# Altium PCB Mini-Rambo-ATX-Panel.PcbDoc
Units mm, origin at the board's own origin, x right, y up, seen from the top; angles counter-clockwise.
Board outline 223.1 x 226.1 mm, 4 copper layers (Top, GND, Supply, Bottom), stack 1.57 mm thick; 8 components, 0 nets, 12 pads, 0 vias.
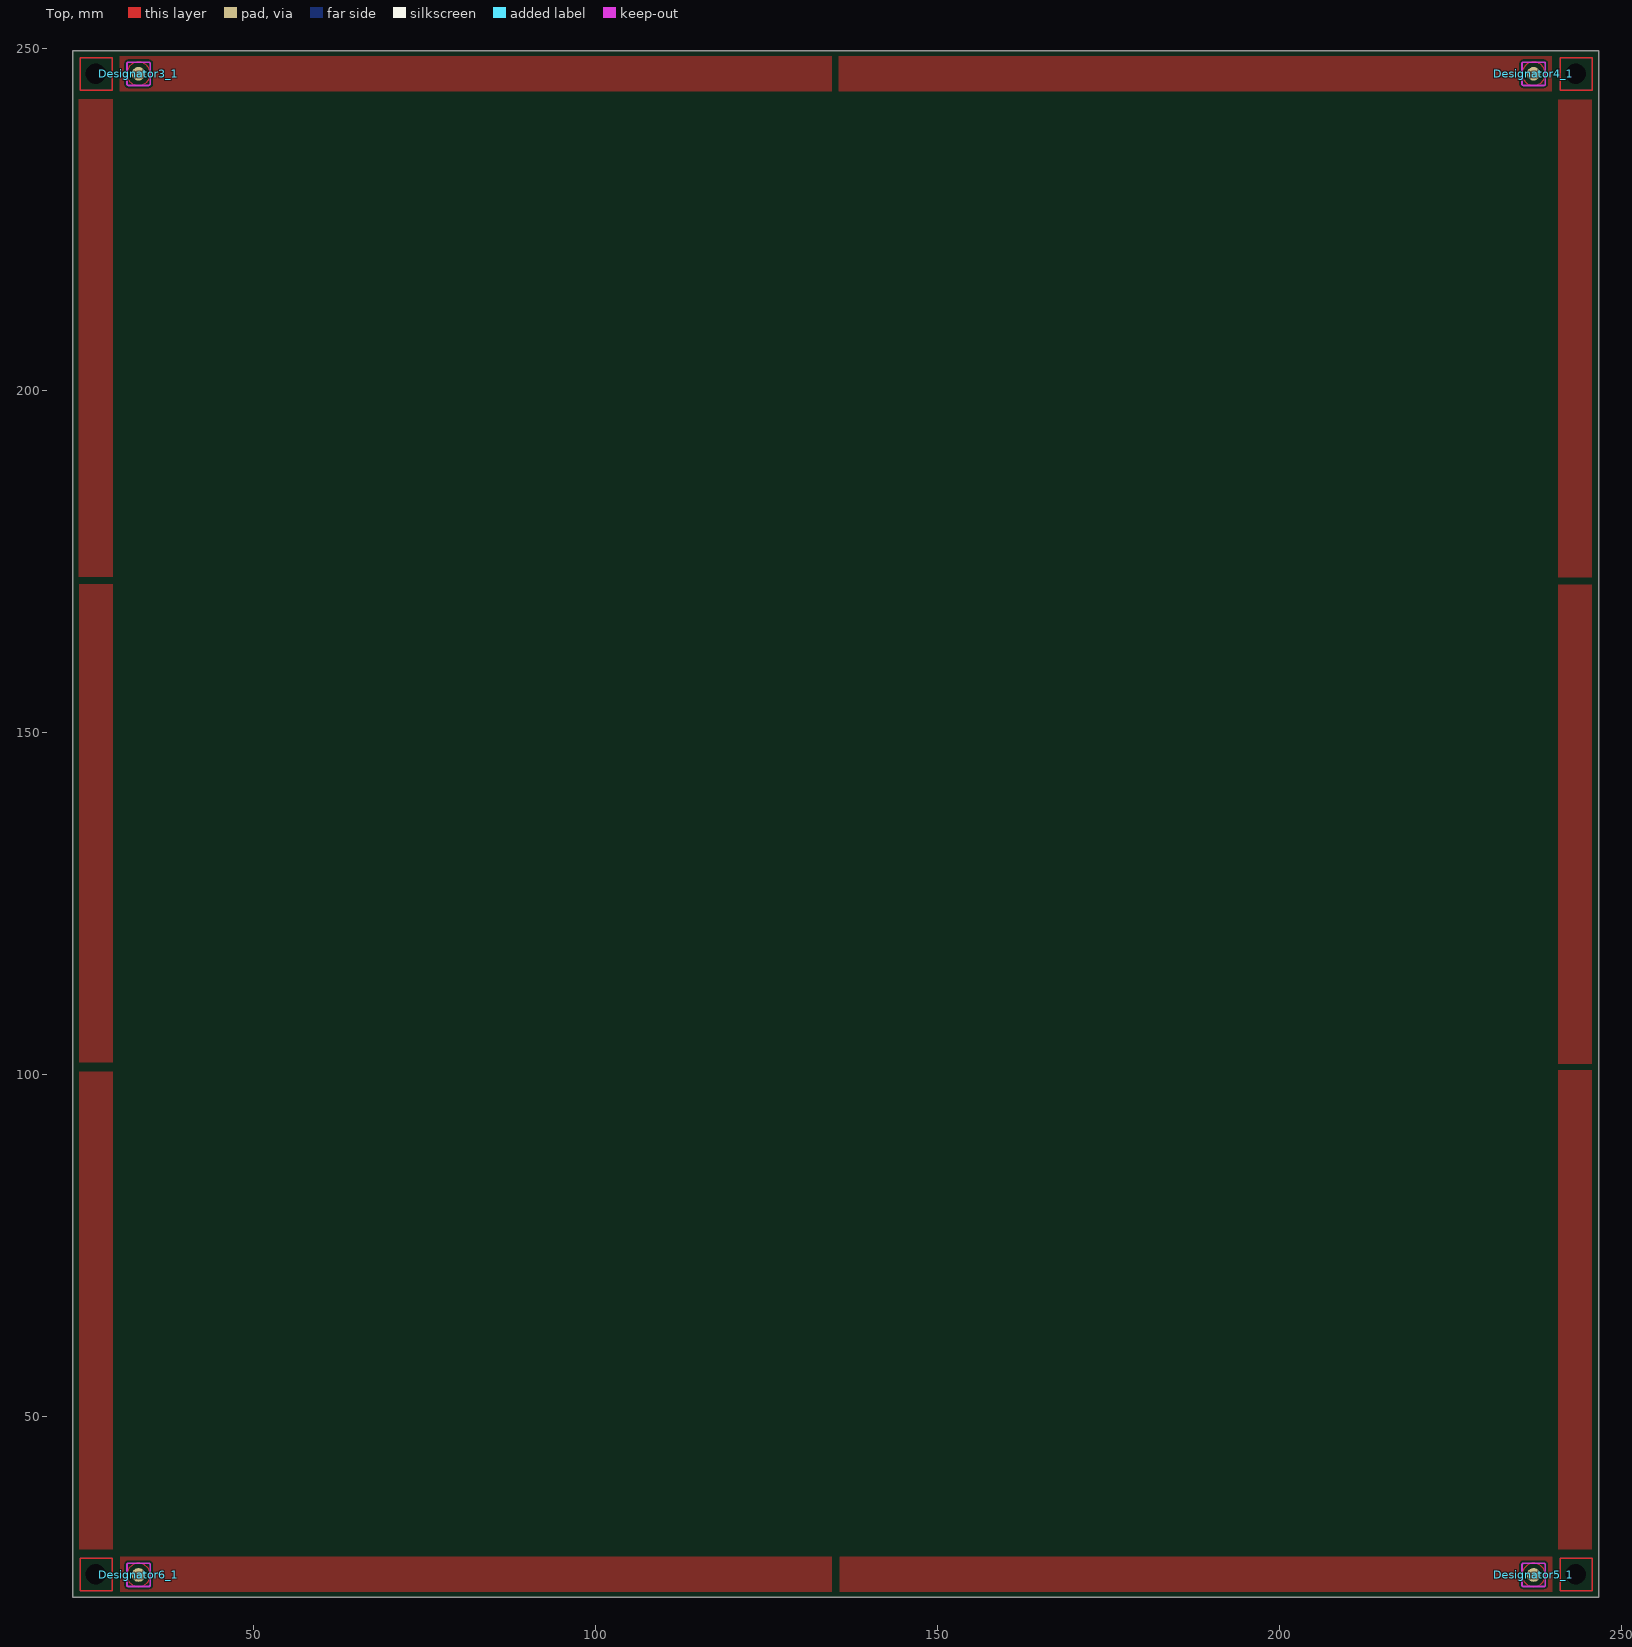
[diagram p0: Top view]
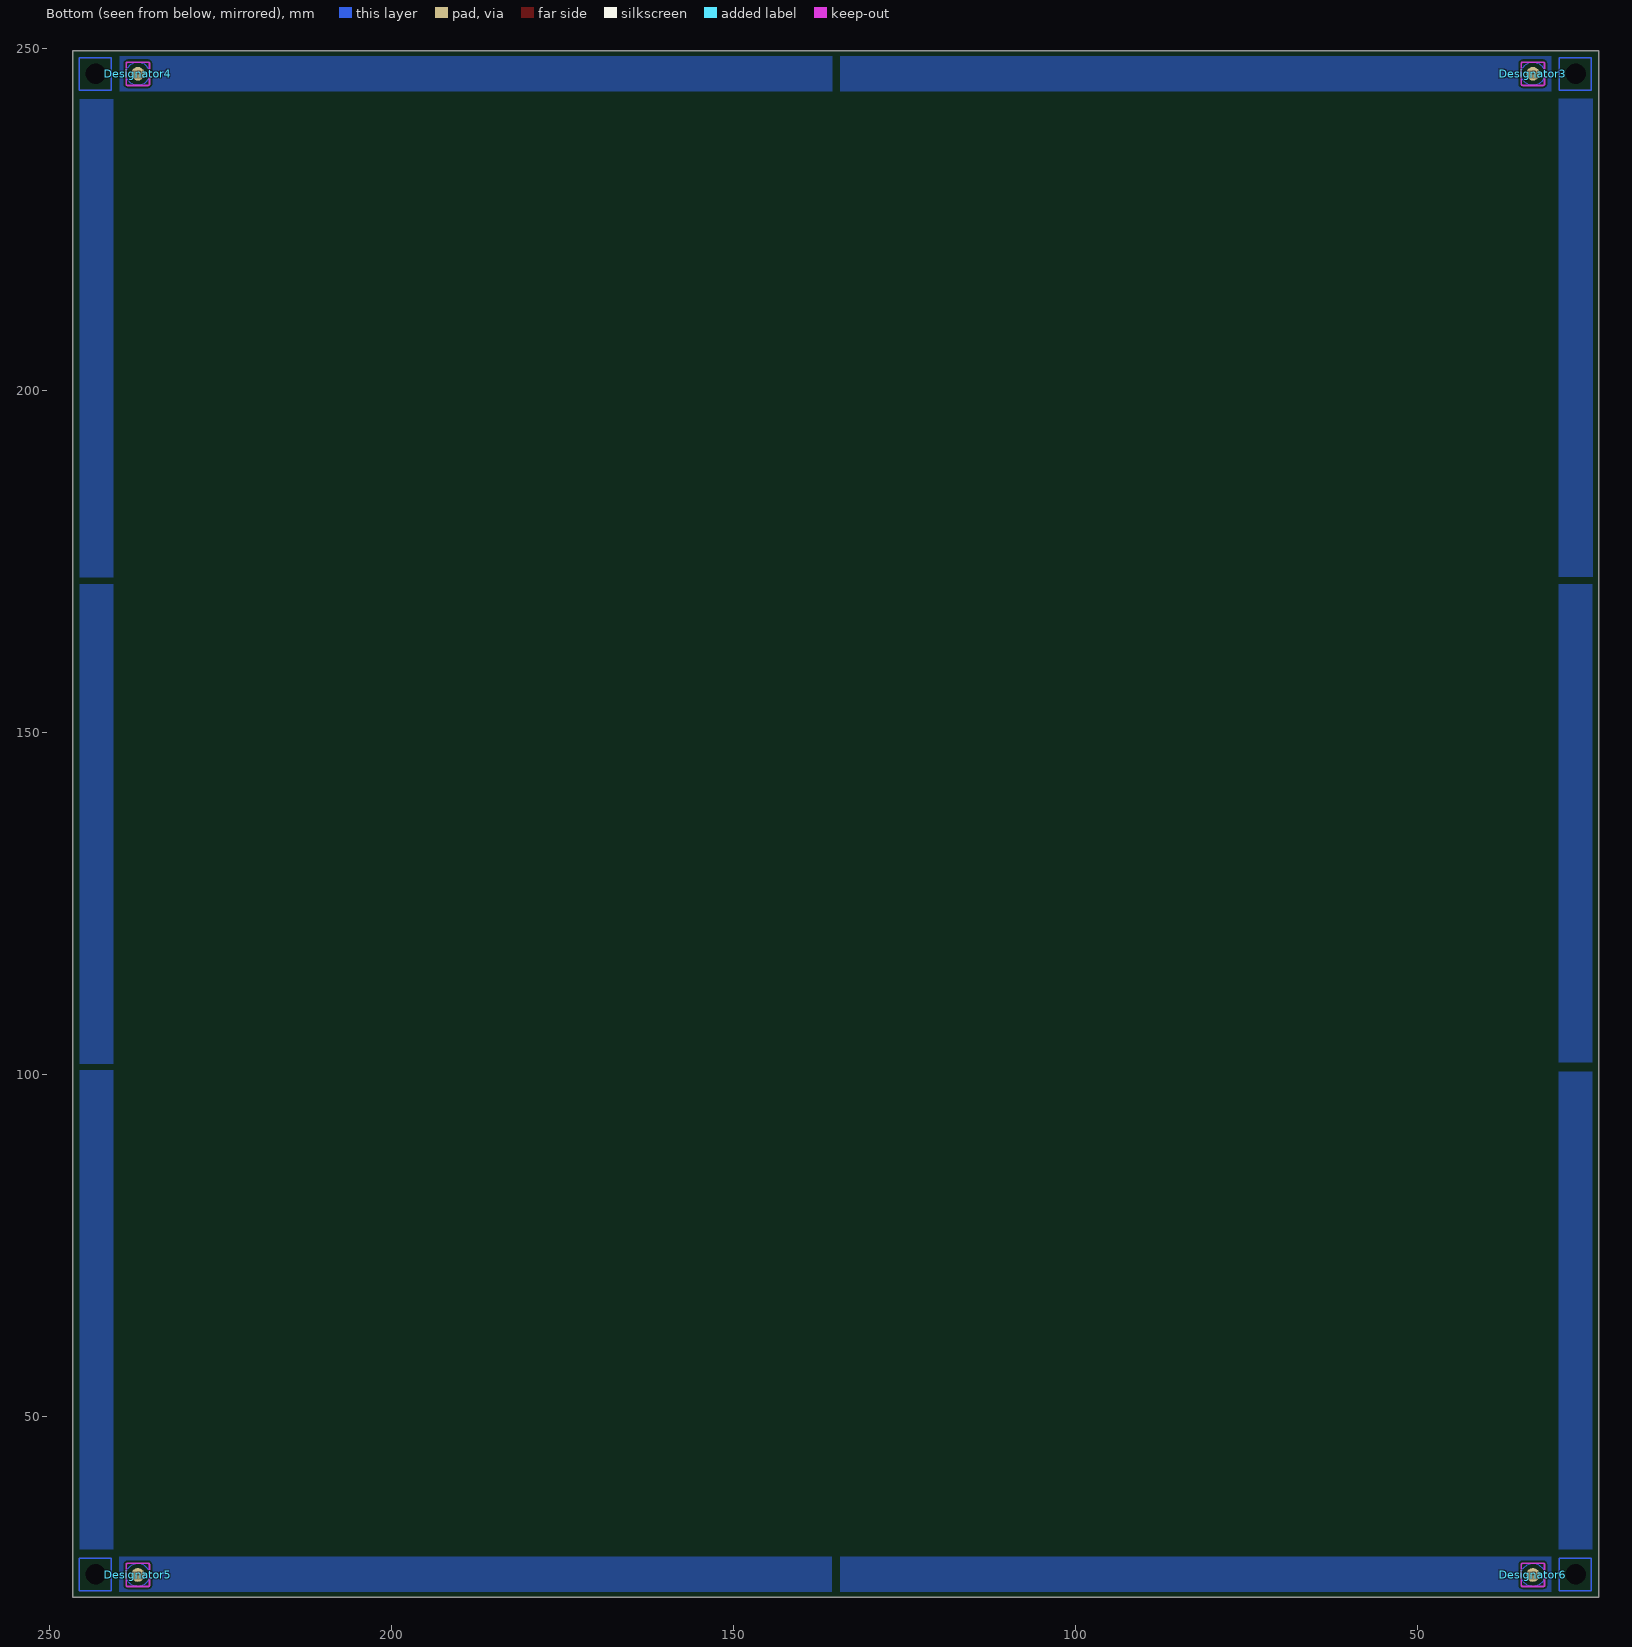
[diagram p1: Bottom view, seen from below]
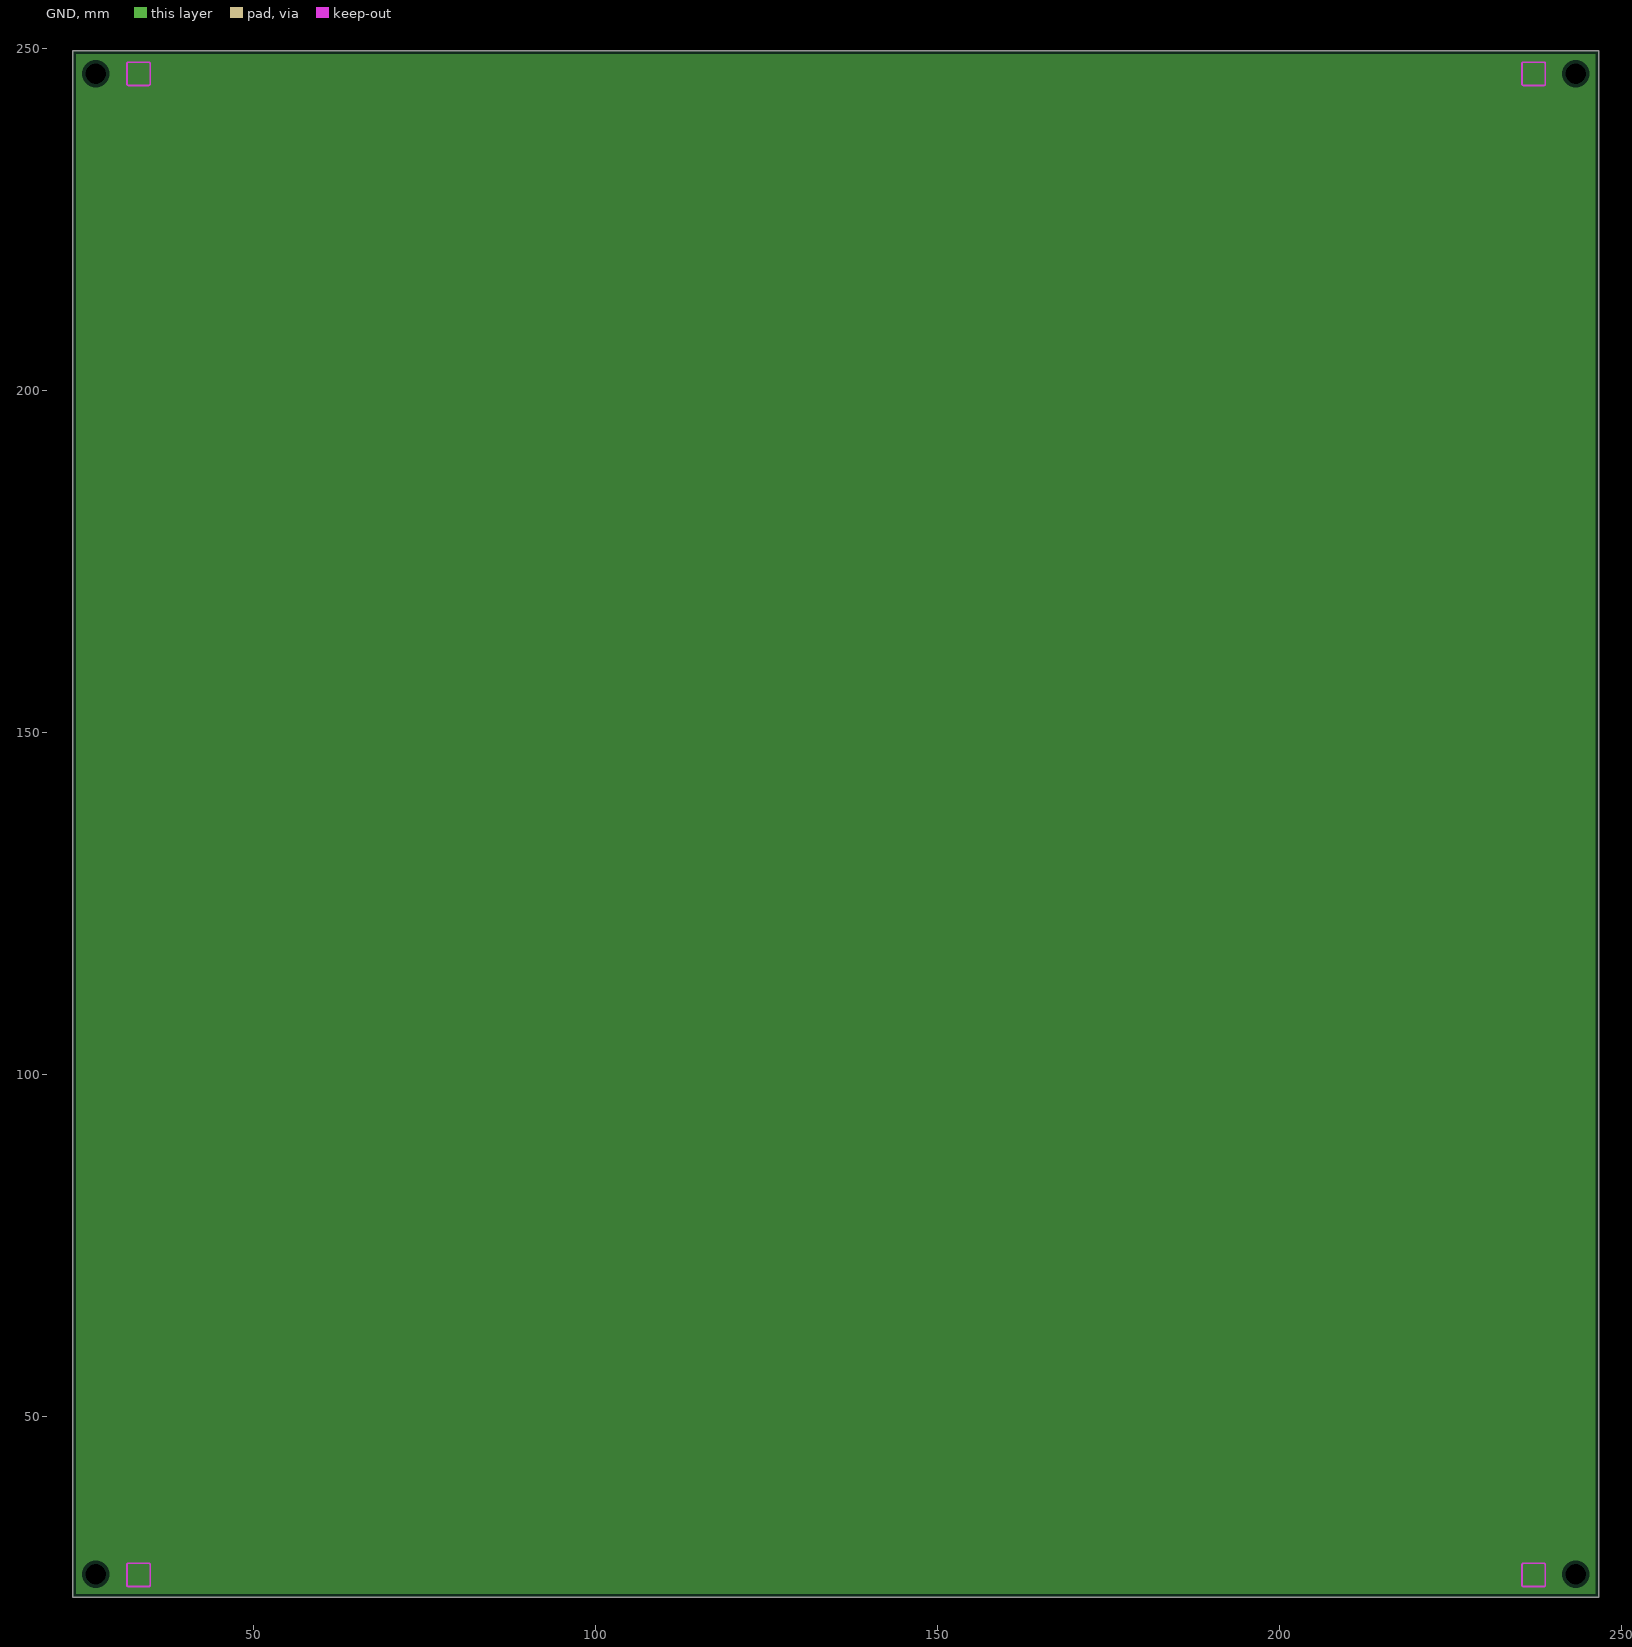
[diagram p2: GND, clearances drawn from the general rule]

## Layer stack, top to bottom
Top Solder: solder mask 0.012, Solder Resist, Dk 3.5
Top: signal copper 0.07
Dielectric 1: prepreg 0.55, FR-4, Dk 4.2
GND: plane copper 0.035
Dielectric 2: core 0.26, FR-4, Dk 4.2
Supply: signal copper 0.035
Dielectric 3: prepreg 0.55, FR-4, Dk 4.2
Bottom: signal copper 0.07
Bottom Solder: solder mask 0.012, Solder Resist, Dk 3.5

## Board outline
23.55,23.55 23.55,249.65 246.65,249.65 246.65,23.55

## Design rules (kind name [scope] priority, off if disabled: settings)
Clearance [All] p1: gap=0.254
PlaneClearance [All] p1: clearance=0.508
PlaneConnect [All] p1: planeconnectstyle=Relief reliefexpansion=0.508 reliefentries=4 reliefconductorwidth=0.254 reliefairgap=0.254
PolygonConnect [All] p1: connectstyle=Relief reliefconductorwidth=0.254 reliefentries=4 polygonreliefangle="90 Angle" airgapwidth=0.254
RoutingVias [All] p1: holewidth=0.711 width=1.27 viastyle="Through Hole" minholewidth=0.711 minwidth=1.27 maxholewidth=0.711 maxwidth=1.27
SolderMaskExpansion [All] p1: expansion=0.102
Width [All] p1: maxlimit=0.254 minlimit=0.254 preferedwidth=0.254
27 further rules are at their usual default settings.

## Components (designator, comment, footprint, x,y, rotation, side; value= is the part's Value field where it differs from the comment)
Designator3 "Comment" FIDUCIAL-2X3-PANEL 33.175,246.275 r90 bottom
Designator3_1 "Comment" FIDUCIAL-2X3-PANEL 33.175,246.275 r90 top
Designator4 "Comment" FIDUCIAL-2X3-PANEL 237.125,246.275 r90 bottom
Designator4_1 "Comment" FIDUCIAL-2X3-PANEL 237.125,246.275 r90 top
Designator5 "Comment" FIDUCIAL-2X3-PANEL 237.125,26.825 r90 bottom
Designator5_1 "Comment" FIDUCIAL-2X3-PANEL 237.125,26.825 r90 top
Designator6 "Comment" FIDUCIAL-2X3-PANEL 33.175,26.825 r90 bottom
Designator6_1 "Comment" FIDUCIAL-2X3-PANEL 33.175,26.825 r90 top

## Footprints (in the part's own frame and the unit in brackets; to place one, negate y for a bottom-side part, rotate by r counter-clockwise, add the part's x,y. Pads: shape width x height; smd on the part's side, far side on the other; paste and mask are expansions set on the pad)
FIDUCIAL-2X3-PANEL [mm]
  rrect100% 2x2 smd paste+0 mask+0.508: 1(0,0)
  Top circle w0.178: c0,0 r1.7
  Keep-Out Layer lines w0.254: -1.5,-1.7 cw(c-1.5,-1.5) -1.7,-1.5 -1.7,1.5 cw(c-1.5,1.5) -1.5,1.7 1.5,1.7 cw(c1.5,1.5) 1.7,1.5 1.7,-1.5 cw(c1.5,-1.5) 1.5,-1.7 -1.5,-1.7
  body extent -1.01,-1.01 1.02,1.01, height 0.02

## Free pads (board coordinates)
  round 0 hole 3 unplated paste-99 mask-0.102: 0(26.925,26.925) 1(243.275,26.925) 2(243.275,246.275) 3(26.925,246.275)

## Nets (pads, with @x,y where several pads share a name; then routed paths per layer and width w, separated by ;. In a path a pad name is that pad's centre, name@x,y a point inside that pad or via, vN(x,y) a via of type N, cw(c..) or ccw(c..) an arc to the next point about the centre after c; other vN are vias at no path point)
pads on no net: Designator3.1 Designator3_1.1 Designator4.1 Designator4_1.1 Designator5.1 Designator5_1.1 Designator6.1 Designator6_1.1
copper on no net: | length 150.4
  Top w0.254: 24.65,24.525 24.65,29.25 29.325,29.25 29.325,24.525 24.65,24.525 ; 24.65,243.875 24.65,248.6 29.325,248.6 29.325,243.875 24.65,243.875 ; 241,24.525 241,29.25 245.675,29.25 245.675,24.525 241,24.525 ; 241,243.875 241,248.6 245.675,248.6 245.675,243.875 241,243.875
  Bottom w0.254: 24.65,24.525 24.65,29.25 29.325,29.25 29.325,24.525 24.65,24.525 ; 24.65,243.875 24.65,248.6 29.325,248.6 29.325,243.875 24.65,243.875 ; 241,24.525 241,29.25 245.675,29.25 245.675,24.525 241,24.525 ; 241,243.875 241,248.6 245.675,248.6 245.675,243.875 241,243.875

## Polygon pours and split planes (outlines as drawn)
no net on Bottom "Frame-Copper" (solid, pour order 38): 245.65,242.55 245.65,172.65 246.875,172.65 240.725,172.65 240.725,242.55
no net on Bottom "Frame-Copper" (solid, pour order 39): 29.375,242.625 29.375,172.725 30.6,172.725 24.45,172.725 24.45,242.625
no net on Bottom "Frame-Copper" (solid, pour order 28): 30.5,24.4 134.475,24.4 134.475,29.475 30.5,29.475
no net on Bottom "Frame-Copper" (solid, pour order 26): 135.65,24.4 239.85,24.4 239.85,29.475 135.65,29.475
no net on Bottom "Frame-Copper" (solid, pour order 24): 135.575,243.725 239.8,243.725 239.8,248.8 135.575,248.8
no net on Bottom "Frame-Copper" (solid, pour order 22): 30.5,243.725 134.475,243.725 134.475,248.8 30.5,248.8
no net on Bottom "Frame-Copper" (solid, pour order 40): 29.425,171.675 29.425,101.775 30.65,101.775 24.5,101.775 24.5,171.675
no net on Bottom "Frame-Copper" (solid, pour order 34): 29.425,100.375 29.425,30.6 30.65,30.6 24.5,30.6 24.5,100.375
no net on Bottom "Frame-Copper" (solid, pour order 32): 245.65,100.625 245.65,30.6 246.875,30.6 240.725,30.6 240.725,100.625
no net on Bottom "Frame-Copper" (solid, pour order 30): 245.65,171.625 245.65,101.525 246.875,101.525 240.725,101.525 240.725,171.625
no net on Top "Frame-Copper" (solid, pour order 35): 245.65,242.5 245.65,172.65 246.875,172.65 240.725,172.65 240.725,242.5
no net on Top "Frame-Copper" (solid, pour order 36): 29.375,242.575 29.375,172.725 30.6,172.725 24.45,172.725 24.45,242.575
no net on Top "Frame-Copper" (solid, pour order 27): 30.5,24.4 134.525,24.4 134.525,29.475 30.5,29.475
no net on Top "Frame-Copper" (solid, pour order 25): 135.675,24.4 239.85,24.4 239.85,29.475 135.675,29.475
no net on Top "Frame-Copper" (solid, pour order 23): 135.575,243.725 239.8,243.725 239.8,248.8 135.575,248.8
no net on Top "Frame-Copper" (solid, pour order 21): 30.4,243.725 134.5,243.725 134.5,248.8 30.4,248.8
no net on Top "Frame-Copper" (solid, pour order 37): 29.425,171.625 29.425,101.775 30.65,101.775 24.5,101.775 24.5,171.625
no net on Top "Frame-Copper" (solid, pour order 33): 29.425,100.375 29.425,30.6 30.65,30.6 24.5,30.6 24.5,100.375
no net on Top "Frame-Copper" (solid, pour order 31): 245.65,100.625 245.65,30.6 246.875,30.6 240.725,30.6 240.725,100.625
no net on Top "Frame-Copper" (solid, pour order 29): 245.65,171.575 245.65,101.525 246.875,101.525 240.725,101.525 240.725,171.575
no net on GND (split plane): 246.14,24.06 24.06,24.06 24.06,249.14 246.14,249.14

## Silkscreen, mask and mechanical layers (free items; w line width, h text height)
Dimension:
  the board outline again, w0.254
PCB Document:
  drawing of 347 lines, arcs and shapes, not listed
  text "Notes" at 390.144,182.88 h1.52
  text "Layer" at 275,182.526 h1.52
  text "Name" at 285.412,182.526 h1.52
  text "Material" at 309.027,182.526 h1.52
  text "Thickness" at 330.865,182.526 h1.52
  text "Constant" at 347.371,182.526 h1.52
  text "Board Layer Stack" at 361.846,182.526 h1.52
  text "File" at 267.208,182.372 h1.52
  text "1" at 275,179.478 h1.52
  text "Top Paste" at 285.412,179.478 h1.52
  text "GTP" at 267.716,179.324 h1.52
  text "2" at 275,176.43 h1.52
  text "Top Overlay" at 285.412,176.43 h1.52
  text "GTO" at 267.716,176.276 h1.52
  text "3" at 275,173.382 h1.52
  text "Top Solder" at 285.412,173.382 h1.52
  text "Solder Resist" at 309.027,173.382 h1.52
  text "0.012mm" at 330.865,173.382 h1.52
  text "3.5" at 347.371,173.382 h1.52
  text "GTS" at 267.716,173.228 h1.52
  text "4" at 275,170.334 h1.52
  text "Top" at 285.412,170.334 h1.52
  text "Copper" at 309.027,170.334 h1.52
  text "0.070mm" at 330.865,170.334 h1.52
  text "GTL" at 267.716,170.18 h1.52
  text "5" at 275,167.286 h1.52
  text "Dielectric 1" at 285.412,167.286 h1.52
  text "FR-4" at 309.027,167.286 h1.52
  text "0.550mm" at 330.865,167.286 h1.52
  text "4.2" at 347.371,167.286 h1.52
  text "Negative Layer" at 389.636,164.592 h1.52
  text "6" at 275,164.238 h1.52
  text "GND" at 285.412,164.238 h1.52
  text "Copper" at 309.027,164.238 h1.52
  text "0.035mm" at 330.865,164.238 h1.52
  text "GP1" at 267.716,164.084 h1.52
  text "7" at 275,161.19 h1.52
  text "Dielectric 2" at 285.412,161.19 h1.52
  text "FR-4" at 309.027,161.19 h1.52
  text "0.260mm" at 330.865,161.19 h1.52
  text "4.2" at 347.371,161.19 h1.52
  text "8" at 275,158.142 h1.52
  text "Supply" at 285.412,158.142 h1.52
  text "Copper" at 309.027,158.142 h1.52
  text "0.035mm" at 330.865,158.142 h1.52
  text "G1" at 267.716,157.988 h1.52
  text "9" at 275,155.094 h1.52
  text "Dielectric 3" at 285.412,155.094 h1.52
  text "FR-4" at 309.027,155.094 h1.52
  text "0.550mm" at 330.865,155.094 h1.52
  text "4.2" at 347.371,155.094 h1.52
  text "GBL" at 267.716,152.4 h1.52
  text "10" at 275,152.046 h1.52
  text "Bottom" at 285.412,152.046 h1.52
  text "Copper" at 309.027,152.046 h1.52
  text "0.070mm" at 330.865,152.046 h1.52
  text "11" at 275,148.998 h1.52
  text "Bottom Solder" at 285.412,148.998 h1.52
  text "Solder Resist" at 309.027,148.998 h1.52
  text "0.012mm" at 330.865,148.998 h1.52
  text "3.5" at 347.371,148.998 h1.52
  text "GBS" at 267.716,148.844 h1.52
  text "12" at 275,145.95 h1.52
  text "Bottom Overlay" at 285.412,145.95 h1.52
  text "13" at 275,142.902 h1.52
  text "Bottom Paste" at 285.412,142.902 h1.52
Drill Drawing:
  drawing of 173 lines, arcs and shapes, not listed
  text "Symbol" at 281.035,126.408 h1.83
  text "Hit Count" at 293.884,126.408 h1.83
  text "Finished Hole Size" at 311.609,126.408 h1.83
  text "Plated" at 345.787,126.408 h1.83
  text "Hole Type" at 358.636,126.408 h1.83
  text "12" at 293.884,122.598 h1.52
  text "1.499mm (59.00mil)" at 311.609,122.598 h1.52
  text "PTH" at 345.787,122.598 h1.52
  text "Round" at 358.636,122.598 h1.52
  text "12" at 293.884,118.788 h1.52
  text "2.210mm (87.00mil)" at 311.609,118.788 h1.52
  text "PTH" at 345.787,118.788 h1.52
  text "Round" at 358.636,118.788 h1.52
  text "16" at 293.884,114.978 h1.52
  text "3.000mm (118.11mil)" at 311.609,114.978 h1.52
  text "NPTH" at 345.787,114.978 h1.52
  text "Round" at 358.636,114.978 h1.52
  text "18" at 293.884,111.168 h1.52
  text "0.711mm (28.00mil)" at 311.609,111.168 h1.52
  text "PTH" at 345.787,111.168 h1.52
  text "Round" at 358.636,111.168 h1.52
  text "24" at 293.884,107.358 h1.52
  text "1.397mm (55.00mil)" at 311.609,107.358 h1.52
  text "PTH" at 345.787,107.358 h1.52
  text "Round" at 358.636,107.358 h1.52
  text "24" at 293.884,103.548 h1.52
  text "3.000mm (118.11mil)" at 311.609,103.548 h1.52
  text "PTH" at 345.787,103.548 h1.52
  text "Round" at 358.636,103.548 h1.52
  text "60" at 293.884,99.738 h1.52
  text "0.900mm (35.43mil)" at 311.609,99.738 h1.52
  text "PTH" at 345.787,99.738 h1.52
  text "Round" at 358.636,99.738 h1.52
  text "72" at 293.884,95.928 h1.52
  text "2.540mm (100.00mil)" at 311.609,95.928 h1.52
  text "PTH" at 345.787,95.928 h1.52
  text "Round" at 358.636,95.928 h1.52
  text "96" at 293.884,92.118 h1.52
  text "0.965mm (38.00mil)" at 311.609,92.118 h1.52
  text "PTH" at 345.787,92.118 h1.52
  text "Round" at 358.636,92.118 h1.52
  text "144" at 293.884,88.308 h1.52
  text "1.800mm (70.87mil)" at 311.609,88.308 h1.52
  text "PTH" at 345.787,88.308 h1.52
  text "Round" at 358.636,88.308 h1.52
  text "240" at 293.884,84.498 h1.52
  text "0.559mm (22.00mil)" at 311.609,84.498 h1.52
  text "PTH" at 345.787,84.498 h1.52
  text "Round" at 358.636,84.498 h1.52
  text "348" at 293.884,80.688 h1.52
  text "1.016mm (40.00mil)" at 311.609,80.688 h1.52
  text "PTH" at 345.787,80.688 h1.52
  text "Round" at 358.636,80.688 h1.52
  text "3336" at 293.884,76.878 h1.52
  text "0.381mm (15.00mil)" at 311.609,76.878 h1.52
  text "PTH" at 345.787,76.878 h1.52
  text "Round" at 358.636,76.878 h1.52
  text "4402 Total" at 293.884,73.068 h1.52
Panel Dimension:
  lines w0.254: 23.55,249.65 246.65,249.65 ; 23.95,179.45 23.95,23.95 247.45,23.95 ; 246.25,23.95 246.25,179.45
V-Score:
  lines w0.254: 23.55,29.9 246.625,29.9 ; 23.55,101.05 246.65,101.05 ; 23.55,172.15 246.65,172.15 ; 23.625,243.3 246.65,243.3 ; 29.9,23.65 29.9,249.65 ; 135.05,23.55 135.05,249.65 ; 240.2,23.575 240.2,249.65

## Dimensions
246.65,23.55 to 246.65,249.65 on Bot Courtyard
23.55,23.55 to 246.65,23.55 on Bot Courtyard

## Panel: embedded boards
"..\Mini-Rambo\board\Mini-Rambo-ATX.PcbDoc" at 30,30, 3 rows x 2 columns, spacing 71.1 x 105.1, rotation 0